# Altium PCB medusa-AI.PcbDoc
Units mm, origin at the board's own origin, x right, y up, seen from the top; angles counter-clockwise.
Board outline 184.4 x 70.23 mm, 4 copper layers (Top Layer, GND, VCC, Bottom Layer), stack 0.776 mm thick; 75 components, 66 nets, 400 pads, 80 vias.
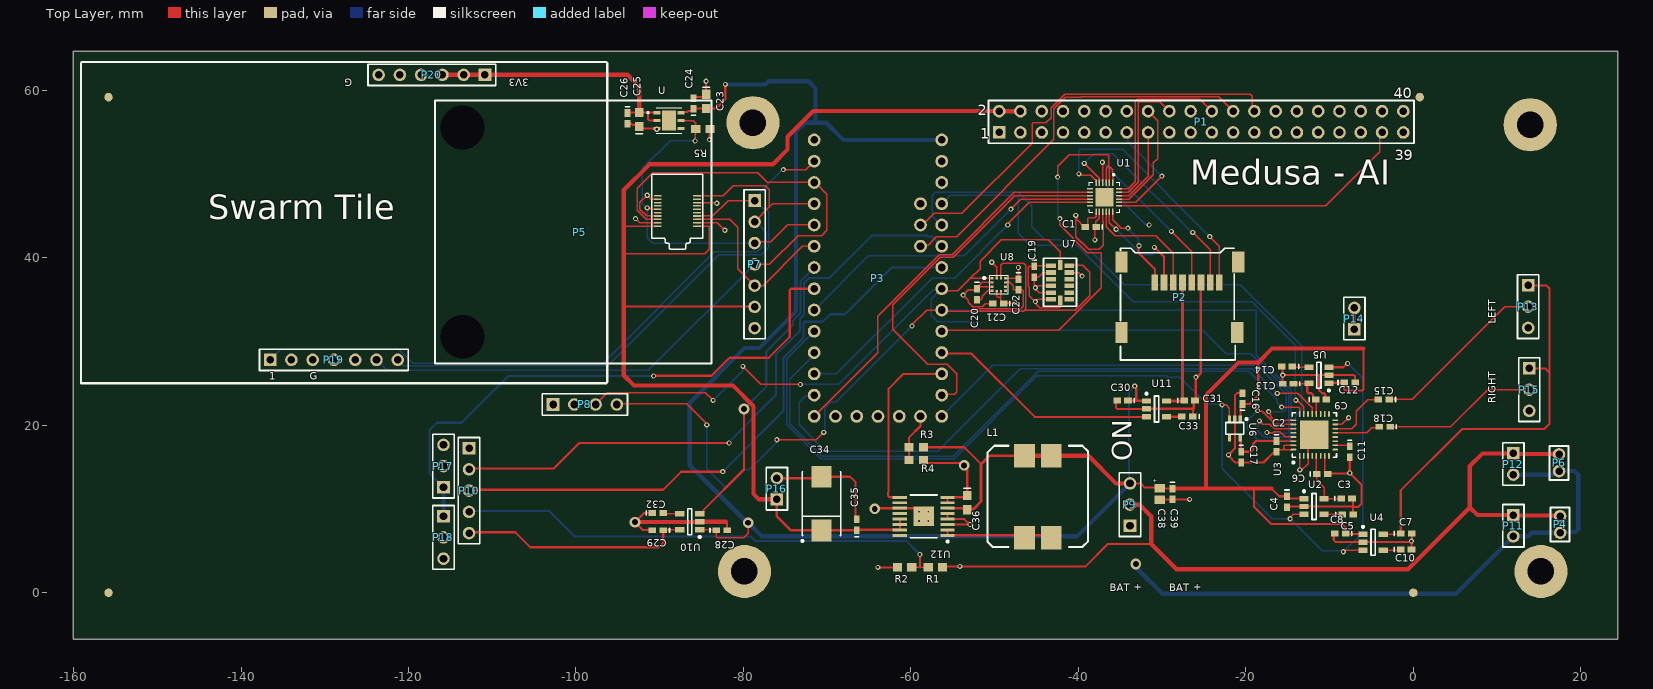
[diagram p0: Top Layer view]
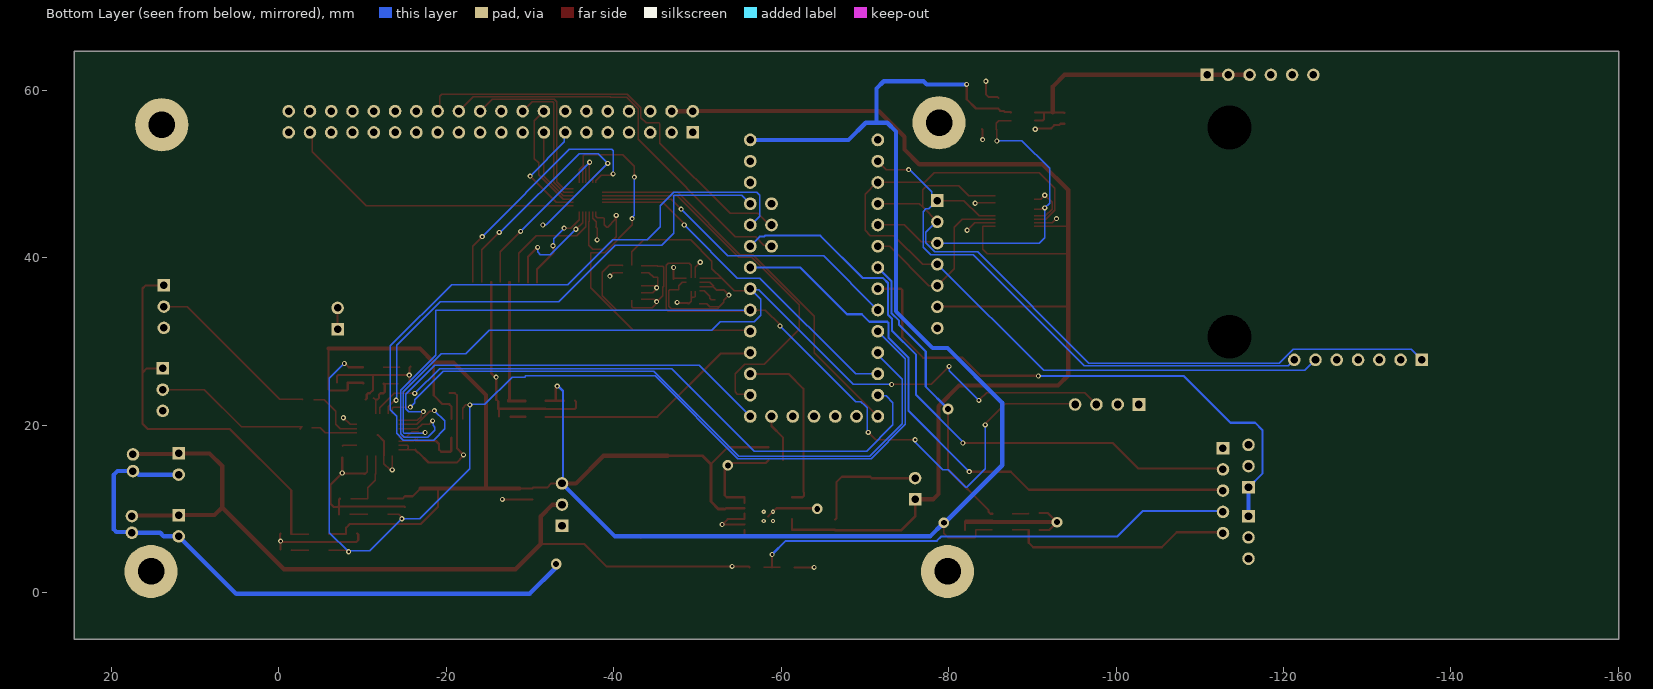
[diagram p1: Bottom Layer view, seen from below]
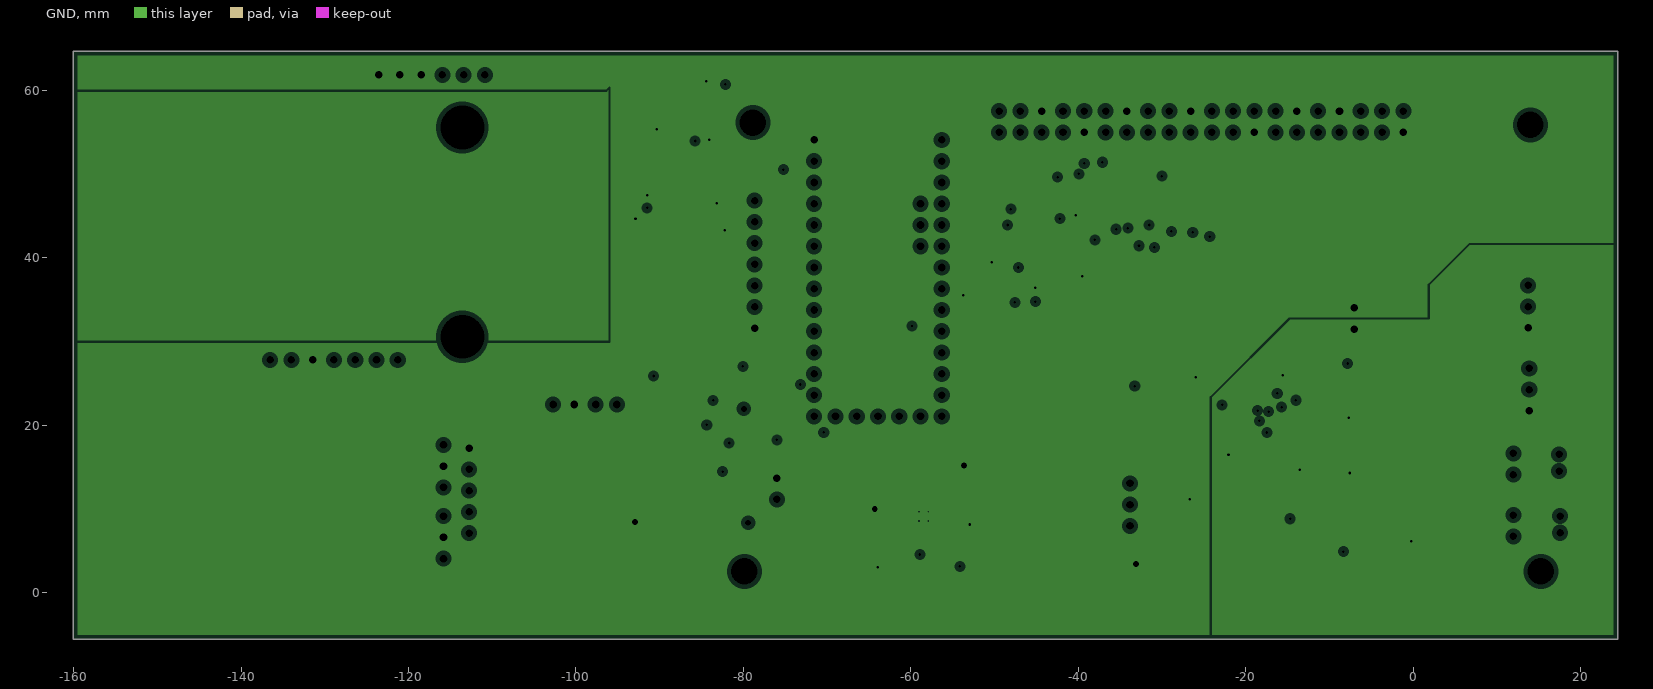
[diagram p2: GND, clearances drawn from the general rule]
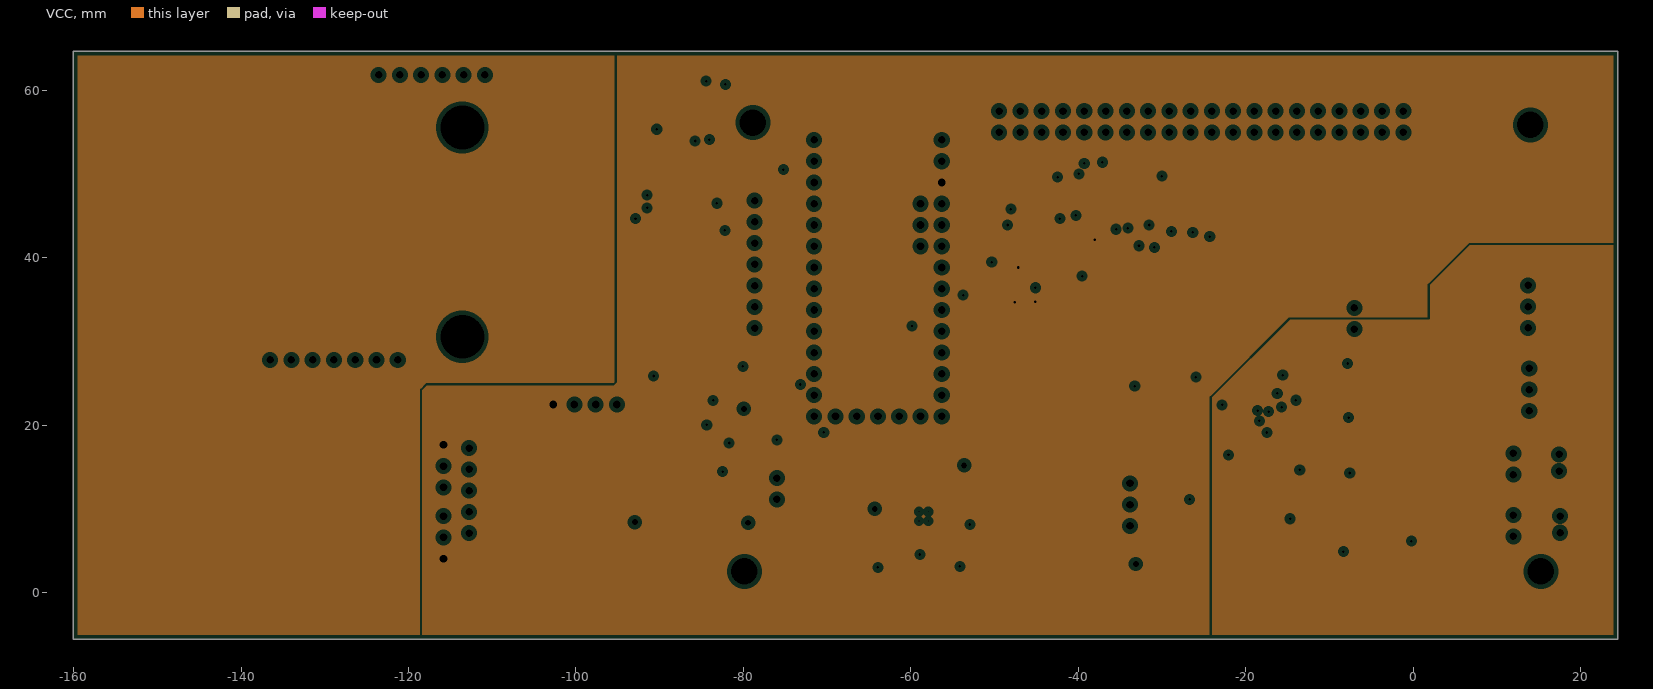
[diagram p3: VCC, clearances drawn from the general rule]

## Layer stack, top to bottom
Top Solder: solder mask 0.0102, Solder Resist, Dk 3.5
Top Layer: signal copper 0.0356
Dielectric 2: prepreg 0.254, FR-4, Dk 3.9
GND: plane copper 0.035, net DGND
Dielectric 1: dielectric 0.127, FR-4, Dk 4.8
VCC: plane copper 0.035, net 3V3
Dielectric 3: prepreg 0.254, FR-4, Dk 3.9
Bottom Layer: signal copper 0.0356
Bottom Solder: solder mask 0.0102, Solder Resist, Dk 3.5

## Board outline
-160.02,-5.588 -160.02,64.643 24.384,64.643 24.384,-5.588

## Design rules (kind name [scope] priority, off if disabled: settings)
Clearance [All] p1: gap=0.152 ignorepadtopadclearanceinfootprint=FALSE
PlaneClearance [All] p1: clearance=0.508
PlaneConnect [All] p1: planeconnectstyle=Relief reliefexpansion=0.508 reliefentries=4 reliefconductorwidth=0.254 reliefairgap=0.254
PolygonConnect [All] p1: connectstyle=Relief reliefconductorwidth=0.254 reliefentries=4 polygonreliefangle="90 Angle" airgapwidth=0.254
RoutingVias [All] p1: holewidth=0.305 width=0.61 viastyle="Through Hole" minholewidth=0.254 minwidth=0.508 maxholewidth=0.711 maxwidth=1.27
SolderMaskExpansion [All] p1: expansion=0.102 istentingtop=FALSE
Width [All] p1: maxlimit=0.508 minlimit=0.152 preferedwidth=0.254
28 further rules are at their usual default settings.

## Classes and differential pairs
component class medusa-AI: C1 C38 C39 P1 P2 P3 P4 P5 P6 P7 P8 P9 P11 P12 P17 P18 P19 P20 U1
component class medusa-AI-sensors: C19 C20 C21 C22 P10 R1 R2 U7 U8
component class medusa-AI-power: C23 C24 C25 C26 C28 C29 C30 C31 C32 C33 C34 C35 C36 L1 P16 R3 R4 R5 U U10 U11 U12
component class medusa-AI-audio: C2 C3 C4 C5 C6 C7 C8 C9 C10 C11 C12 C13 C14 C15 C16 C17 C18 P13 P14 P15 U2 U3 U4 U5 U6

## Components (designator, comment, footprint, x,y, rotation, side; value= is the part's Value field where it differs from the comment)
C1 "0.1uF" 0402 -38.537,43.662 r180 top
C2 "0.1uF" 0402 -16.357,17.47 r270 top
C3 "0.1uF" 0402 -7.975,11.247 r0 top
C4 "1uF" 0402 -15.087,10.866 r270 top value=0.1uF
C5 "0.01uF" 0402 -7.848,9.342 r0 top value=0.1uF
C6 "0.1uF" 0402 -10.896,14.168 r0 top
C7 "0.1uF" 0402 -0.863,7.056 r0 top
C8 "1uF" 0402 -8.741,7.056 r180 top value=0.1uF
C9 "0.1uF" 0402 -11.023,23.058 r0 top
C10 "0.01uF" 0402 -0.867,5.151 r0 top value=0.1uF
C11 "0.1uF" 0402 -7.594,16.82 r270 top
C12 "1uF" 0402 -7.594,25.09 r0 top value=0.1uF
C13 "0.1uF" 0402 -14.96,24.963 r180 top
C14 "0.01uF" 0402 -15.087,26.995 r180 top value=0.1uF
C15 "1.0uF" 0402 -3.53,23.058 r180 top value=0.1uF
C16 "1.0uF" 0402 -20.421,23.185 r90 top value=0.1uF
C17 "1.0uF" 0402 -20.548,16.2 r270 top value=0.1uF
C18 "1.0uF" 0402 -3.429,19.812 r180 top value=0.1uF
C19 "0.1uF" 0402 -45.268,38.328 r270 top
C20 "100nF" 0402 -52.126,35.661 r270 top value=1.0uF
C21 "1.0uF" 0402 -49.586,34.518 r180 top
C22 "100nF" 0402 -47.173,36.804 r270 top value=1.0uF
C23 "C0603" 0603 -84.455,58.674 r270 top value=10uF
C24 "1.0uF" 0402 -85.979,58.42 r90 top value=0.1uF
C25 "C0603" 0603 -92.456,56.515 r90 top value=10uF
C26 "0.1uF" 0402 -93.853,56.642 r270 top
C28 "1.0uF" 0402 -82.606,7.467 r0 top value=0.1uF
C29 "1.0uF" 0402 -90.226,7.467 r180 top value=0.1uF
C30 "1.0uF" 0402 -34.727,22.961 r180 top value=0.1uF
C31 "1.0uF" 0402 -26.726,22.961 r0 top value=0.1uF
C32 "10nF" 0402 -90.226,9.499 r0 top value=0.1uF
C33 "10nF" 0402 -26.98,21.056 r180 top value=0.1uF
C34 "T495X227K010ATE050" X -70.668,10.642 r90 top value=220uF
C35 "2.2uF" 0402 -66.477,8.102 r90 top
C36 "C0603" 0603 -53.269,10.769 r270 top value=10uF
C38 "10uF" Tant0805 -30.282,11.785 r90 top
C39 "0.1uF" 0402 -28.758,11.785 r270 top
L1 "6.8uH" "Inductor - duplicate" -46.436,6.557 r180 top
P1 "Header 20X2" HDR2X20 -49.459,54.965 r0 top
P2 "microSD-Molex" microSD_Molex_hinged -21.392,39.471 r270 top
P3 "Teensy3.x" Teensy3.x -71.557,48.996 r180 top
P4 "Battery _2mm" HDR_2x1_2mm 17.526,9.16 r180 top
P5 "Iridiuim9603" Iridium9603 -87.926,45.567 r90 top
P6 "Battery _2mm" HDR_2x1_2mm 17.399,16.526 r180 top
P7 "Iridium" HDR1X7 -78.669,46.837 r270 top
P8 "Header 4" HDR1X4 -102.743,22.479 r0 top
P9 "switch" HDR1X3 -33.838,7.975 r90 top
P10 "Header 5" HDR1X5 -112.776,17.272 r270 top
P11 "BAT" HDR1X2 11.938,9.271 r270 top
P12 "BAT" HDR1X2 11.938,16.637 r270 top
P13 "HYDROPHONE" HDR1X3 13.716,36.703 r270 top
P14 "GND Tie" HDR1X2 -7.041,31.47 r90 top
P15 "HYDROPHONE" HDR1X3 13.843,26.797 r270 top
P16 "UltraCap" HDR1X2 -76.002,11.15 r90 top
P17 "IR" HDR1X3 -115.824,12.573 r90 top
P18 "IR" HDR1X3 -115.824,9.144 r270 top
P19 "Header 7" HDR1X7 -136.525,27.813 r0 top
P20 "Header 6" HDR1X6 -110.871,61.849 r180 top
R1 "100k" 3-0603 -57.079,3.022 r0 top
R2 "100k" 3-0603 -60.762,3.022 r0 top
R3 "100k" 3-0603 -59.365,17.373 r0 top
R4 "100k" 3-0603 -59.365,15.849 r180 top
R5 "20k" 3-0603 -84.836,55.372 r0 top
U "LD39200PU33R" SON95P300X300X100-7N -88.9,56.388 r0 top
U1 "MAX4996ETG+" QFN40P350X350X80-25N -36.886,47.218 r270 top
U2 "LP3985IM5-3.3" MF05A_N -11.855,10.297 r0 top
U3 "SGTL5000" QFN32 -11.825,18.847 r90 top
U4 "LP3985IM5-3.3" MF05A_N -4.8,6.04 r0 top
U5 "LP3985IM5-3.3" MF05A_N -11.277,25.979 r180 top
U6 "TLV70018DCKR" TI-DCK5_V -21.31,19.629 r270 top
U7 "ADXL343" ADXL345 -43.272,39.039 r0 top
U8 "LIS3MDL" LGA-12 -50.297,37.55 r0 top
U10 "LP3985IM5-3.3" MF05A_N -86.416,8.483 r180 top
U11 "LP3985IM5-3.3" MF05A_N -30.663,21.945 r0 top
U12 "TPS61032" TPS6103x -58.476,9.118 r180 top

## Footprints (in the part's own frame and the unit in brackets; to place one, negate y for a bottom-side part, rotate by r counter-clockwise, add the part's x,y. Pads: shape width x height; smd on the part's side, far side on the other; paste and mask are expansions set on the pad)
3-0603 [mm] "Chip Resistor; Body 1.6 x 0.9 mm (LxW typ)"
  rect 1.1x1 smd: 1(-0.85,0) 2(0.85,0)
0402 [mm] "Chip Capacitor; Body 1.0 x 0.5 mm (LxW typ)"
  rect 0.9x0.7 smd: 1(-0.65,0) 2(0.65,0)
  silkscreen extent -1.4,-0.25 -1.4,0.25
0603 [mm] "Chip Capacitor; Body 1.6 x 0.8 mm (LxW typ)"
  rect 1.1x1 smd: 1(-0.85,0) 2(0.85,0)
  silkscreen extent -1.7,-0.4 -1.7,0.4
ADXL345 [mm] "Digital Accelerometer"
  rect 1.145x0.55 smd: 1(0,0) 2(0,-0.8) 3(0,-1.6) 4(0,-2.4) 5(0,-3.2) 6(0,-4) 8(2.195,-4) 9(2.195,-3.2) 10(2.195,-2.4) 11(2.195,-1.6) 12(2.195,-0.8) 13(2.195,0)
  rect 0.55x1.145 smd: 7(1.098,-4.098) 14(1.098,0.098)
  silkscreen extent -0.89,-4.83 3.05,0.89
HDR1X2 [mm] "Connector; Header; 2 Position"
  rect 1.5x1.5 hole 0.9: 1(0,0)
  round 1.5 hole 0.9: 2(2.54,0)
  silkscreen extent -1.27,-1.27 3.81,1.27
HDR1X3 [mm] "Connector; Header; 3 Position"
  rect 1.5x1.5 hole 0.9: 1(0,0)
  round 1.5 hole 0.9: 2(2.54,0) 3(5.08,0)
  silkscreen extent -1.27,-1.27 6.35,1.27
HDR1X4 [mm] "Connector; Header; 4 Position"
  rect 1.5x1.5 hole 0.9: 1(0,0)
  round 1.5 hole 0.9: 2(2.54,0) 3(5.08,0) 4(7.62,0)
  silkscreen extent -1.27,-1.27 8.89,1.27
HDR1X5 [mm] "Connector; Header; 5 Position"
  rect 1.5x1.5 hole 0.9: 1(0,0)
  round 1.5 hole 0.9: 2(2.54,0) 3(5.08,0) 4(7.62,0) 5(10.16,0)
  silkscreen extent -1.27,-1.27 11.43,1.27
HDR1X6 [mm] "Connector; Header; 6 Position"
  rect 1.5x1.5 hole 0.9: 1(0,0)
  round 1.5 hole 0.9: 2(2.54,0) 3(5.08,0) 4(7.62,0) 5(10.16,0) 6(12.7,0)
  silkscreen extent -1.27,-1.27 13.97,1.27
HDR1X7 [mm] "Connector; Header; 7 Position"
  rect 1.5x1.5 hole 0.9: 1(0,0)
  round 1.5 hole 0.9: 2(2.54,0) 3(5.08,0) 4(7.62,0) 5(10.16,0) 6(12.7,0) 7(15.24,0)
  silkscreen extent -1.27,-1.27 16.51,1.27
HDR2X20 [mm] "Connector; Header; 20x2 Position"
  rect 1.5x1.5 hole 0.9: 1(0,0)
  round 1.5 hole 0.9: 2(0,2.54) 3(2.54,0) 4(2.54,2.54) 5(5.08,0) 6(5.08,2.54) 7(7.62,0) 8(7.62,2.54) 9(10.16,0) 10(10.16,2.54) 11(12.7,0) 12(12.7,2.54) 13(15.24,0) 14(15.24,2.54) 15(17.78,0) 16(17.78,2.54) 17(20.32,0) 18(20.32,2.54) 19(22.86,0) 20(22.86,2.54) 21(25.4,0) 22(25.4,2.54) 23(27.94,0) 24(27.94,2.54) 25(30.48,0) 26(30.48,2.54) 27(33.02,0) 28(33.02,2.54) 29(35.56,0) 30(35.56,2.54) 31(38.1,0) 32(38.1,2.54) 33(40.64,0) 34(40.64,2.54) 35(43.18,0) 36(43.18,2.54) 37(45.72,0) 38(45.72,2.54) 39(48.26,0) 40(48.26,2.54)
  silkscreen extent -1.27,-1.27 49.53,3.81
HDR_2x1_2mm [mm]
  round 1.5 hole 0.9: 1(0,0.016) 2(0,2)
  silkscreen extent -1.14,-1.02 1.14,3.05
"Inductor - duplicate" [mm] "Sumida Inductor"
  rect 2.45x2.8 smd: 1(-3.2,0) 1(0,0) 2(-3.2,-9.8) 2(0,-9.8)
  silkscreen extent -7.6,-11 4.4,1.1
Iridium9603 [mm]
  round 1.524 hole 5.25: 0(-15,25.64) 0(9.99,25.64)
  rect 0.18x0.93 smd paste-0.02 mask+0.05: 1(-1.778,-2.37) 2(-1.778,2.3) 3(-1.378,-2.37) 4(-1.378,2.3) 5(-0.978,-2.37) 6(-0.978,2.3) 7(-0.578,-2.37) 8(-0.578,2.3) 9(-0.178,-2.37) 10(-0.178,2.3) 11(0.222,-2.37) 12(0.222,2.3) 13(0.622,-2.37) 14(0.622,2.3) 15(1.022,-2.37) 16(1.022,2.3) 17(1.422,-2.37) 18(1.422,2.3) 19(1.822,-2.37) 20(1.822,2.3)
  silkscreen extent -18.2,-4.1 13.2,28.9
LGA-12 [mm] "LIS2DS12"
  rect 0.35x0.28 smd: 1(0,0) 2(0,-0.5) 3(0,-1) 4(0,-1.5) 7(1.6,-1.5) 8(1.6,-1) 9(1.6,-0.5) 10(1.6,0)
  rect 0.28x0.35 smd: 5(0.55,-1.55) 6(1.05,-1.55) 11(1.05,0.05) 12(0.55,0.05)
  silkscreen extent -1.05,-1.85 1.9,0.35
MF05A_N [mm] "SOT23, 5-Leads, Body 2.9x1.6mm, Pitch 0.95mm, Lead Span 2.8mm, IPC Medium Density"
  rect 1.1x0.65 smd: 1(-1.2,0.95) 2(-1.2,0) 3(-1.2,-0.95) 4(1.2,-0.95) 5(1.2,0.95)
  silkscreen extent -1.32,-1.55 0.25,1.95, body extent -0.9,-1.55 0.9,1.55, height 1.19
microSD_Molex_hinged [mm]
  rect 2.5x1.5 smd: 0(0,0.508) 0(8.382,0.381)
  rect 2.5x1.45 smd: 0(0,-13.45) 0(8.382,-13.462)
  rect 1.9x0.8 smd: 1(2.4,-9.475) 2(2.4,-8.375) 3(2.4,-7.275) 4(2.4,-6.175) 5(2.4,-5.075) 6(2.4,-3.975) 7(2.4,-2.875) 8(2.4,-1.775)
  silkscreen extent -1.65,-13.59 11.68,0.13
QFN32 [mm]
  oval 0.7x0.2 smd: 1(-2.5,1.75) 2(-2.5,1.25) 3(-2.5,0.75) 4(-2.5,0.25) 5(-2.5,-0.25) 6(-2.5,-0.75) 7(-2.5,-1.25) 8(-2.5,-1.75) 17(2.5,-1.75) 18(2.5,-1.25) 19(2.5,-0.75) 20(2.5,-0.25) 21(2.5,0.25) 22(2.5,0.75) 23(2.5,1.25) 24(2.5,1.75)
  oval 0.2x0.7 smd: 9(-1.75,-2.5) 10(-1.25,-2.5) 11(-0.75,-2.5) 12(-0.25,-2.5) 13(0.25,-2.5) 14(0.75,-2.5) 15(1.25,-2.5) 16(1.75,-2.5) 25(1.75,2.5) 26(1.25,2.5) 27(0.75,2.5) 28(0.25,2.5) 29(-0.25,2.5) 30(-0.75,2.5) 31(-1.25,2.5) 32(-1.75,2.5)
  rect 3.4x3.4 smd paste-1.2: 33(0,0)
  silkscreen extent -3.42,-2.65 2.65,2.65, body extent -2.5,-2.5 2.5,2.5, height 1
QFN40P350X350X80-25N [mm]
  rrect6% 0.76x0.18 smd: 1(-1.73,1) 2(-1.73,0.6) 3(-1.73,0.2) 4(-1.73,-0.2) 5(-1.73,-0.6) 6(-1.73,-1) 13(1.73,-1) 14(1.73,-0.6) 15(1.73,-0.2) 16(1.73,0.2) 17(1.73,0.6) 18(1.73,1)
  rrect6% 0.18x0.76 smd: 7(-1,-1.73) 8(-0.6,-1.73) 9(-0.2,-1.73) 10(0.2,-1.73) 11(0.6,-1.73) 12(1,-1.73) 19(1,1.73) 20(0.6,1.73) 21(0.2,1.73) 22(-0.2,1.73) 23(-0.6,1.73) 24(-1,1.73)
  rect 2.2x2.2 smd paste-2: 25(0,0)
  silkscreen extent -2.8,-1.8 1.8,1.8
SON95P300X300X100-7N [mm]
  rrect25% 0.86x0.4 smd: 1(-1.435,0.95) 2(-1.435,0) 3(-1.435,-0.95) 4(1.435,-0.95) 5(1.435,0) 6(1.435,0.95)
  rect 1.63x2.37 smd paste-2: 7(0,0)
  silkscreen extent -2.59,-1.5 1.5,1.5
Tant0805 [mil]
  rect 40x50 smd: 1(-26.5,0) 2(26.5,0)
Teensy3.x [mil]
  round 60 hole 35: 0(0,-100) GND(0,-200)
  round 60 hole 36: 1(0,0) 2(0,100) 3(0,200) 3.3V2(-200,1100) 4(0,300) 5(0,400) 6(0,500) 7(0,600) 8(0,700) 9(0,800) 10(0,900) 11(0,1000) 12(0,1100) 13(-600,1100) 14(-600,1000) 15(-600,900) 16(-600,800) 17(-600,700) 18(-600,600) 19(-600,500) 20(-600,400) 21(-600,300) 22(-600,200) 23(-600,100) A10(-500,200) A11(-500,300) A14(-500,1100) AGND(-600,-100) AREF(-500,100) GND2(-300,1100) PGM(-400,1100) VBat(-100,1100) Vin(-600,-200)
  round 60 hole 36 paste+0: 3.3V(-600,0)
TI-DCK5_V [mm] "SOT23, 5-Leads, Body 2x1.25mm, Pitch 0.65mm"
  rect 0.9x0.4 smd: 1(-1.1,0.65) 2(-1.1,0) 3(-1.1,-0.65) 4(1.1,-0.65) 5(1.1,0.65)
  silkscreen extent -1.22,-1.07 0.7,1.53, body extent -0.63,-1 0.63,1, height 1.1
TPS6103x [mm] "TSOP, 16-Leads, Body 5.00x4.40mm, Pitch 0.65mm, Thermal Pad 2.31.2x2.46.2mm, IPC Medium Density"
  rect 1.7x0.35 smd: 1(-2.85,2.275) 2(-2.85,1.625) 3(-2.85,0.975) 4(-2.85,0.325) 5(-2.85,-0.325) 6(-2.85,-0.975) 7(-2.85,-1.625) 8(-2.85,-2.275) 9(2.85,-2.275) 10(2.85,-1.625) 11(2.85,-0.975) 12(2.85,-0.325) 13(2.85,0.325) 14(2.85,0.975) 15(2.85,1.625) 16(2.85,2.275)
  rect 2.46x2.31 smd: 17(0,0)
  silkscreen extent -2.98,-2.55 1.6,3.12, body extent -2.25,-2.55 2.25,2.55, height 1.2
X [mm] "Capacitor, SM Tantalum; Body 7.3 x 4.3 mm (LxW typ)"
  rect 2.6x2.4 smd: 1(-3.2,0) 2(3.2,0)
  silkscreen extent -4.57,-2.3 3.8,2.42

## Part data
C1 C2 C3 C4 C5 C6 C7 C8 C9 C10 C11 C12 C13 C14 C15 C16 C17 C18 C19 C20 C21 C22 C24 C26 C28 C29 C30 C31 C32 C33 C35 C39: library part C0402, "Ceramic Chip Capacitor - Standard", PackageDocument=Mar-2001, Code_IPC="1005 [0402]", Code_JEITA=0402, ComponentLink1Description="Manufacturer Link", ComponentLink1URL=http://www.kemet.com/, ComponentLink2Description=Datasheet, ComponentLink2URL=http://www.kemet.com/kemet/web/homepage/kechome.nsf/vapubfilesname/F3102TA.pdf/$file/F3102TA.pdf, DatasheetDocument=Mar-2001, LatestRevisionDate=19-Mar-2004, LatestRevisionNote="Silkscreen size reduced.", Note="Footprint corresponds to dimensions for bulk cassette packaging. This case size has tightened tolerances.", PackageReference=0402, Published=17-Jul-2002, Publisher="Altium Limited"
C23 C25 C36: "Ceramic Chip Capacitor - Standard", PackageDocument=Mar-2001, Code_IPC="1608 [0603]", Code_JEITA=0603, ComponentLink1Description="Manufacturer Link", ComponentLink1URL=http://www.kemet.com/, ComponentLink2Description=Datasheet, ComponentLink2URL=http://www.kemet.com/kemet/web/homepage/kechome.nsf/vapubfilesname/F3102TA.pdf/$file/F3102TA.pdf, DatasheetDocument=Mar-2001, LatestRevisionDate=19-Mar-2004, LatestRevisionNote="Silkscreen size reduced.", Note="Footprint corresponds to dimensions for bulk cassette packaging. This case size has tightened tolerances.", PackageReference=0603, Published=17-Jul-2002, Publisher="Altium Limited"
C34: library part T495X, "Solid Tantalum Chip Capacitor, Standard T495 Series - Low ESR, Surge Robust", PackageDocument=Mar-2001, Code_JEITA=7343-43, ComponentLink1Description="Manufacturer Link", ComponentLink1URL=http://www.kemet.com/, ComponentLink2Description=Datasheet, ComponentLink2URL=http://www.kemet.com/kemet/web/homepage/kechome.nsf/vapubfilesname/F3102TA.pdf/$file/F3102TA.pdf, DatasheetDocument=Mar-2001, LatestRevisionDate=19-Mar-2004, LatestRevisionNote="Silkscreen dimensions re-sized.", PackageReference=X, PCB_Layout="Round Glue Pad at 2.9 ±0.1mm in diameter at KEMET's option", Published=17-Jul-2002, Publisher="Altium Limited"
C38: library part Tant0805
L1: library part "Inductor 6.8uH", "Sumida Inductor", Supplier Part Number 1=308-1937-2-ND, Supplier 1=Digi-Key
P1: "Header, 20-Pin, Dual row", LatestRevisionDate=17-Jul-2002, LatestRevisionNote="Re-released for DXP Platform.", Publisher="Altium Limited"
P2: library part microSD_Molex_hinged, Supplier Part Number 1=WM19081DKR-ND, Supplier 1=Digi-Key
P4 P6: library part HDR_2x1_2mm, "Charging Connector"
P5: library part IRIDIUM9603
P7: library part "Header 7", "Header, 7-Pin", LatestRevisionDate=17-Jul-2002, LatestRevisionNote="Re-released for DXP Platform.", Publisher="Altium Limited"
P8: "Header, 4-Pin", LatestRevisionDate=17-Jul-2002, LatestRevisionNote="Re-released for DXP Platform.", Publisher="Altium Limited"
P9 P13 P15 P17 P18: library part "Header 3", "Header, 3-Pin", LatestRevisionDate=17-Jul-2002, LatestRevisionNote="Re-released for DXP Platform.", Publisher="Altium Limited"
P10: "Header, 5-Pin", LatestRevisionDate=17-Jul-2002, LatestRevisionNote="Re-released for DXP Platform.", Publisher="Altium Limited"
P11 P12 P14 P16: library part "Header 2", "Header, 2-Pin", LatestRevisionDate=17-Jul-2002, LatestRevisionNote="Re-released for DXP Platform.", Publisher="Altium Limited"
P19: "Header, 7-Pin", LatestRevisionDate=17-Jul-2002, LatestRevisionNote="Re-released for DXP Platform.", Publisher="Altium Limited"
P20: "Header, 6-Pin", LatestRevisionDate=17-Jul-2002, LatestRevisionNote="Re-released for DXP Platform.", Publisher="Altium Limited"
R1 R2 R3 R4 R5: library part ERJ3RK, "Precision Thick Film Chip Resistor, 10 Ohm to 1M Ohm Range, 1% and 0.5% Tolerance, 0603 Size, 0.063 W", PackageDocument=Mar-2003, Code_IPC="1608 [0603]", ComponentLink1Description="Manufacturer Link", ComponentLink1URL=http://www.panasonic.com/industrial/components/resistive_products.htm, ComponentLink2Description=Datasheet, ComponentLink2URL=http://www.panasonic.com/industrial/components/pdf/AOA0000CE2.pdf, LatestRevisionDate=19-Mar-2004, LatestRevisionNote="Silkscreen size reduced.", PackageReference=3-0603, Published=17-Dec-2003, Publisher="Altium Limited"
U: "Linear Voltage Regulator IC 1 Output 2A 6-DFN _3x3_", Package="DFN-6 STMicroelectronics", Availability=Unavailable, MF=STMicroelectronics, MP=LD39200PU33R, Price=None, SnapEDA_Link=https://www.snapeda.com/parts/LD39200PU33R/STMicroelectronics/view-part/482679/?ref=snap
U1: "3 Circuit IC Switch 2:2 4Ohm 24-TQFN (4x4)", Package="TQFN-24 Maxim", Availability=Warning, Check_prices=https://www.snapeda.com/parts/MAX4996ETG+/Maxim%20Integrated/view-part/1193961/?ref=eda, MF="Maxim Integrated", MP=MAX4996ETG+, Price=None, Purchase-URL=https://pricing.snapeda.com/search/part/MAX4996ETG+/?ref=eda, SnapEDA_Link=https://www.snapeda.com/parts/MAX4996ETG+/Maxim%20Integrated/view-part/1193961/?ref=snap
U2 U4 U5 U10 U11: "Micropower, 150mA Low-Noise Ultra Low-Dropout CMOS Voltage Regulator", DigiKeyPartNumber=LP3985IM5-3.3CT-ND, Manufacturer="National Semiconductor", PackageTopMarking=LDQB*XTT, PowerWise=N, ComponentLink1Description="LP3985 Datasheet", ComponentLink1URL=http://www.national.com/ds/LP/LP3985.pdf, ComponentLink2Description="LP3985 Web Page", ComponentLink2URL=http://www.national.com/pf/LP/LP3985.html, ComponentLink3Description="MF05A Package Page", ComponentLink3URL=http://www.national.com/packaging/folders/mf05a.html, CompType="LDO IC", DatasheetVersion=Aug-2005, PackageDescription="Molded SOT-23, .115 x .063 x .040 in Body, 5 Lead, .0375 in Pitch", PackageReference=MF05A, PackageVersion="revD, Aug-2008", PartNumber=LP3985IM5-3.3, PinCount=5, Published=4-Dec-2008, Publisher="Altium Limited", RoHS=O
U6: "Single Output LDO, 200 mA, Fixed 1.8 V Output, 2 to 5.5 V Input, with Low IQ, 5-pin SC70 (DCK), -40 to 125 degC, Green (RoHS & no Sb/Br)", Manufacturer="Texas Instruments", Supplier Part Number 1=296-32409-2-ND, Accuracy(%)=2, Code_JEDEC=MO-203, ComponentLink1Description="Manufacturer URL", ComponentLink1URL=http://www.ti.com/, ComponentLink2Description=Datasheet, ComponentLink2URL=http://www.ti.com/general/docs/lit/getliterature.tsp?genericPartNumber=TLV70018&fileType=pdf, ComponentLink3Description="Package Specification", ComponentLink3URL=http://www.ti.com/litv/pdf/mpds025f, DatasheetVersion=SLVSA00D, Eco-Plan="Green (RoHS & no Sb/Br)", Fixed Output Options(V)=1.8, Iout(Max)(A)=0.2, Iq(Typ)(mA)=0.03, Mounting Technology="Surface Mount", PackageDescription="5-Pin Plastic Small-Outline, Body 2 x 1.25 mm, Pitch 0.65 mm", PackageReference=DCK5, PackageVersion=4093553-3/G, PartNumber=TLV70018DCKR, SubFamily="Single Channel LDO", Supplier 1=Digi-Key, Supplier 2=Digi-Key, Supplier 3=Digi-Key, Supplier 4=Newark, Supplier 5=Mouser, Supplier Part Number 2=296-32409-1-ND, Supplier Part Number 3=296-32409-6-ND, Supplier Part Number 4=55R7461, Supplier Part Number 5=595-TLV70018DCKR, Vdo(Typ)(mV)=175, Vin(Max)(V)=5.5, Vin(Min)(V)=2, Vout Adj(Max)(V)=1.8, Vout Adj(Min)(V)=1.8
U7: library part ADXL345
U8: "magnetometer"
U12: library part TPS6103x, "Boost converter", Supplier 1=Newark, Supplier 2=Digi-Key, Supplier Part Number 2=296-14418-1-ND

## Free pads (board coordinates)
  round 1.016 smd paste-0.508 mask+0.127: 0(-155.829,0) 0(-155.829,59.182) 0(0,0) 0(0.762,59.182)
  round 6.35 hole 3.175: 0(-79.883,2.54) 0(-78.867,56.134) 0(13.97,55.88) 0(15.24,2.54)

## Via types
v1: diameter 0.61, hole 0.305, Top Layer to Bottom Layer, 70 vias
v2: diameter 1.27, hole 0.711, Top Layer to Bottom Layer, 6 vias
v3: diameter 0.5, hole 0.2, Top Layer to Bottom Layer, 4 vias

## Nets (pads, with @x,y where several pads share a name; then routed paths per layer and width w, separated by ;. In a path a pad name is that pad's centre, name@x,y a point inside that pad or via, vN(x,y) a via of type N, cw(c..) or ccw(c..) an arc to the next point about the centre after c; other vN are vias at no path point)
3V3: C1.1 C19.1 C21.1 C22.1 P3.3.3V P8.1 P17.3 P18.3 U1.14 U7.1 U7.6 U7.7 U8.5 U8.6 U8.10 | length 24.2
  Top Layer w0.152: U8.5 -49.747,35.369 -49.658,35.28 -49.374,35.28 -49.247,35.153 ; U8.6 -49.247,35.153 ; C21.1 -48.974,34.518 -49.247,34.792 -49.247,35.153 ; U8.10 -47.269,37.55 C22.1 ; U7.6 -44.874,35.039 v1(-45.141,34.772) ; U7.1 -45.207,39.039 C19.1 -45.888,38.978 -45.98,38.887 -45.98,36.626 -45.845,36.492 -45.845,35.476 v1(-45.141,34.772) ; U7.7 -42.175,34.15 -42.264,34.061 -44.633,34.061 -45.141,34.569 v1(-45.141,34.772) ; v1(-38.029,42.138) -38.029,43.52 C1.1 -37.902,43.677 -37.902,44.297 -37.486,44.713 U1.14
  Top Layer w0.254: C21.1 -48.852,34.602 -47.654,34.602 v1(-47.586,34.67) ; C22.1 v1(-47.173,38.836)
5V_ENABLE: P3.15 U12.9 | length 21.4
  Top Layer w0.254: U12.9 -62.571,11.393 -62.72,11.542 -62.72,11.986 -62.667,12.039 -62.667,24.358 -60.889,26.136 P3.15
AGND: C2.2 C3.2 C4.2 C5.2 C6.2 C7.2 C8.2 C9.2 C10.2 C11.2 C12.2 C13.2 C14.2 C16.2 C17.2 P13.3 P14.1 P15.3 U2.2 U3.1 U3.3 U3.7 U3.15 U3.31 U3.32 U3.33 U4.2 U5.2 U6.2 | length 76.9
  Top Layer w0.152: C2.2@-16.357,17.089 -16.349,17.097 -15.337,17.097 ; U3.32 -15.337,17.097 ; U3.31 -15.341,17.597 -15.468,17.47 -15.468,17.228 -15.337,17.097 ; U3.1 -13.575,14.815 -13.436,14.675 -13.309,14.675 -12.575,15.41 U3.3 ; U3.7 -10.575,14.441 -10.301,14.168 C6.2 ; U3.15 -8.523,20.097 v1(-7.721,20.899)
  Top Layer w0.203: U3.3 U3.33@-12.575,18.097
  Top Layer w0.254: C16.2 -21.041,23.835 -21.31,23.566 -21.31,17.216 v1(-22.072,16.454) -22.072,16.357 -21.645,15.93 -21.645,15.899 -21.31,15.565 -20.563,15.565 C17.2 -17.896,15.55 -16.68,16.766 -16.58,16.766 -16.357,16.989 C2.2@-16.357,17.089 ; C14.2 -15.61,26.868 v1@-15.61,25.979 ; C13.2 v1@-15.61,25.979 ; C4.2 -15.006,10.297 U2.2 -7.198,10.297 ; U3.33@-12.575,18.097 U3.33 ; C9.2 -10.515,23.2 -10.515,23.671 -10.664,23.82 -10.896,23.82 -11.277,24.201 -11.277,25.979 ; C6.2 -10.183,14.231 -7.658,14.231 v1(-7.594,14.295) ; C8.2 -9.499,6.948 -9.499,6.294 -9.245,6.04 v1@-0.25,6.04 ; C11.2 v1(-7.594,14.295) ; C3.2 -7.198,11.12 -7.198,10.297 ; C5.2 -7.198,10.297 ; C12.2 -6.944,25.83 -7.093,25.979 U5.2 -11.277,25.979 ; C10.2 -0.217,6.007 v1@-0.25,6.04 ; C7.2 -0.173,7.015 -0.173,6.117 v1@-0.25,6.04 ; v1@-15.61,25.979 v1(-15.595,25.979) -11.277,25.979 ; v1(-7.594,14.295) -6.197,12.898 -6.197,10.612 -6.578,10.231 -7.086,10.231 -7.152,10.297 -7.198,10.297
  other v1: -0.228,6.167 -13.563,14.676
BCLK: P3.9 U3.24 | length 79.2
  Top Layer w0.152: v1(-15.722,22.169) -13.69,22.169 -13.575,22.054 U3.24
  Bottom Layer w0.152: P3.9 -71.557,28.422 -74.478,25.501 -74.478,20.167 -70.618,16.306 -54.971,16.306 -44.811,26.466 -19.672,26.466 -16.239,23.034 -16.239,22.686 v1(-15.722,22.169)
CS: P3.10 U1.11 | length 41.6
  Top Layer w0.152: v1@-48.57,43.916 -45.868,46.618 U1.11
  Bottom Layer w0.152: P3.10 -68.89,26.136 -57.46,37.566 -54.793,37.566 v1(-48.443,43.916)
DGND: C1.2 C19.2 C20.1 C21.2 C22.2 C23.1 C24.2 C25.1 C26.2 C28.2 C29.2 C30.2 C31.2 C32.1 C33.1 C34.2 C35.2 C36.1 C38.1 C39.2 P1.6 P1.9 P1.14 P1.20 P1.25 P1.30 P1.34 P1.39 P2.6 P3.GND P4.2 P5.3 P5.4 P5.8 P5.15 P5.18 P6.2 P7.7 P8.2 P10.1 P11.2 P12.2 P14.2 P16.2 P17.2 P18.2 P19.3 P20.4 P20.5 P20.6 R2.1 R4.1 R5.2 U1.13 U1.15 U7.2 U7.4 U7.5 U7.12 U8.2 U8.3 U8.9 U8.12 U10.2 U11.2 U12.3 U12.4 U12.5 U12.7 U12.8 U12.11 U12.17 U.3 | length 232.5
  Top Layer w0.152: v1(-92.893,44.678) -92.404,44.189 P5.4 ; P5.8 -91.553,44.989 -92.366,45.801 -92.366,46.603 v1(-91.496,47.472) -91.013,46.989 P5.18 ; P5.3 -83.133,44.189 v1(-82.225,43.281) ; P5.15 -83.247,46.589 -83.114,46.456 v1@-83.114,46.329 ; v1(-53.777,35.534) -53.162,34.919 -53.162,34.665 -52.634,34.137 ; C20.1 -51.887,36.55 U8.3 ; C20.1@-51.937,36.6 -51.487,37.05 U8.2 ; v1(-50.348,39.471) -49.747,38.87 U8.12 ; C21.2 -51.11,34.518 -51.491,34.137 -52.634,34.137 ; U8.9 -48.181,37.05 -47.808,36.677 -47.808,36.258 -47.719,36.169 -47.188,36.169 C22.2 -46.678,36.154 -46.589,36.065 -46.589,34.226 -46.876,33.939 -52.437,33.939 -52.634,34.137 ; U7.5 -44.684,35.839 -45.268,36.423 -45.268,36.728 ; U7.4 -45.179,36.639 -45.268,36.728 ; U7.2 -44.214,38.239 -44.775,37.678 C19.2 -45.268,36.728 ; U7.12 -39.972,38.239 v1(-39.553,37.82) ; U1.13 -37.886,44.948 -38.029,44.805 -38.791,44.805 -38.881,44.716 -38.881,43.936 -39.154,43.662 C1.2 -39.287,43.662 -40.224,44.598 -40.224,44.967 v1(-40.311,45.055) -40.311,42.515 -38.791,40.995 -37.521,40.995 -37.013,41.503 -37.013,44.297 -37.086,44.37 U1.15 ; -26.33,21.833 -26.218,21.945 ; C31.2@-26.218,22.819 C31.2 C31.2@-25.964,23.073 ; v1@-25.964,25.628 v1(-25.964,25.755)
  Top Layer w0.254: C26.2 -93.838,56.007 -93.367,56.007 -93.218,55.858 -92.649,55.858 C25.1 -92.229,55.438 U.3 -90.408,55.365 U.3@-90.638,55.365 ; v2(-92.957,8.42) -92.004,7.467 C29.2 ; v2@-92.893,8.483 -91.877,9.499 C32.1 ; C24.2 -85.867,59.182 -84.797,59.182 C23.1 v1(-84.455,61.087) ; v1(-84.074,54.102) -84.074,55.284 R5.2 ; -82.098,8.483 -81.956,8.341 C28.2 ; C34.2@-70.82,13.69 C34.2 -67.264,13.842 -66.604,13.182 -66.604,8.879 C35.2 ; v2(-64.318,10.007) -64.232,10.093 U12.11 -59.451,10.093 v3(-59.026,9.668) U12.17 ; v1(-63.937,3.022) R2.1 ; R4.1 -58.142,15.476 -54.039,15.476 -53.269,14.706 C36.1 C36.1@-53.495,11.393 ; U12.3 -55.624,8.146 -52.972,8.146 v1(-52.969,8.148) -53.614,8.793 U12.4 U12.5 ; U12.7 U12.8 ; v1(-53.777,35.534) -53.142,36.169 -52.268,36.169 C20.1 ; C30.2 -35.489,22.849 -35.489,22.094 -35.341,21.945 U11.2 ; C38.1 -28.781,11.112 C39.2 -28.743,11.15 v1(-26.726,11.15) ; C33.1 -26.33,21.833 ; -26.218,21.945 C31.2@-26.218,22.819
  Top Layer w0.305: P16.2 C34.2@-70.82,13.69 ; U12.8 C36.1@-53.495,11.393 ; U11.2 -26.218,21.945 ; C31.2@-25.964,23.073 -25.964,25.628 -25.367,26.225 P2.6
  Top Layer w0.508: v2(-92.957,8.42) -92.893,8.483 -92.862,8.451 -85.248,8.451 U10.2 -82.098,8.483
  Bottom Layer w0.508: v2(-33.147,3.429) -33.147,3.048 -29.972,-0.127 5.08,-0.127 P11.2 13.716,6.731 14.145,7.16 P4.2 17.605,7.239 19.387,7.239 19.685,7.537 19.685,14.097 19.256,14.526 P6.2 17.131,14.526 16.702,14.097 P12.2
  other v1: -45.141,36.423 -83.168,46.511 -90.353,55.346
  other v2: -53.65,15.214
  other v3: -59.026,8.568 -57.926,8.568 -57.926,9.668
GPIO22: P1.15 U1.22 | length 9.7
  Top Layer w0.152: U1.22 -33.996,47.418 -31.679,49.735 P1.15
GPIO23: P1.16 U1.21 | length 13.6
  Top Layer w0.152: U1.21 -33.965,47.018 -31.044,49.939 -31.044,51.346 -30.536,51.854 -30.536,56.362 P1.16
GPIO24: P1.18 U1.23 | length 16.5
  Top Layer w0.152: U1.23 -34.027,47.818 -32.822,49.023 -32.822,58.533 -32.733,58.623 -30.257,58.623 P1.18
GPIO25: P1.22 U1.24 | length 21.7
  Top Layer w0.152: U1.24 -34.058,48.218 -33.203,49.073 -33.203,58.621 -32.897,58.927 -25.482,58.927 P1.22
GPIO26: P1.37 U1.19 | length 36.2
  Top Layer w0.152: U1.19 -10.454,46.218 -3.993,52.679 -3.993,54.711 P1.37
GPIO27: P1.13 U1.20 | length 13.4
  Top Layer w0.152: U1.20 -33.168,46.618 v1(-30.028,49.758)
  Bottom Layer w0.152: P1.13 -34.133,54.879 -34.133,53.863 v1(-30.028,49.758)
GPS_EN: P3.5 U10.3 | length 35.2
  Top Layer w0.254: U10.3 -84.991,9.433 -84.793,9.631 -84.793,9.856 -79.939,14.71 v2(-79.939,21.945)
  Bottom Layer w0.254: v2(-79.939,21.945) -77.272,24.612 -77.272,28.803 -74.097,31.978 -74.097,32.463 -73.183,33.378 -73.183,37.21 P3.5
HYDRO_EN: P3.8 U2.3 U4.3 U5.3 U6.3 | length 131
  Top Layer w0.152: v1(-22.834,22.423) -22.356,22.423 -21.96,22.027 U6.3 ; v1@-14.833,8.834 -14.32,9.347 U2.3 ; v1(-8.356,4.897) -8.163,5.09 U4.3@-6.004,5.09
  Top Layer w0.254: U5.3 -8.371,26.929 -7.924,27.376 v1(-7.848,27.376)
  Bottom Layer w0.152: P3.8 -74.859,27.914 -74.859,20.117 -70.744,16.001 -54.845,16.001 -44.964,25.882 -29.52,25.882 -29.393,25.755 -27.869,25.755 -24.593,22.479 v1@-22.987,22.479 ; v1(-22.834,22.423) -22.834,14.833 -16.827,8.826 -15.876,8.826 -15.868,8.834 v1(-14.706,8.834) -10.896,5.024 v1@-8.356,5.024 ; v1(-8.356,4.897) -6.07,7.183 -6.07,25.598 v1(-7.848,27.376)
I2SDIN: P3.22 U3.26 | length 82.5
  Top Layer w0.152: v1(-18.605,21.75) -18.53,21.674 -18.072,21.674 -16.494,20.097 U3.26
  Bottom Layer w0.152: P3.22 -56.444,43.916 -57.46,44.932 -57.46,47.472 -57.079,47.853 -47.213,47.853 -45.567,46.208 -45.567,43.707 -43.998,42.138 -39.871,42.138 -34.537,36.804 -20.675,36.804 -13.335,29.464 -13.335,21.844 -14.079,21.1 -14.079,19.058 -14.899,18.237 -18.491,18.237 -19.812,19.558 -19.812,20.543 v1(-18.605,21.75)
I2SDOUT: P3.13 U3.25 | length 52.7
  Top Layer w0.152: v1(-17.275,21.632) -17.275,21.508 -17.005,21.239 -17.005,21.039 -16.563,20.597 U3.25
  Bottom Layer w0.152: P3.13 -50.221,27.152 -18.643,27.152 -15.189,23.698 -15.189,21.948 -15.546,21.59 -17.233,21.59 v1(-17.275,21.632)
IN_L: C15.2 U3.14 | length 7.5
  Top Layer w0.152: U3.14 -7.372,19.597 -6.832,20.137 -6.832,21.661 -5.435,23.058 C15.2
IN_R: C18.2 U3.13 | length 5.6
  Top Layer w0.152: U3.13 -5.541,19.097 -4.953,19.685 C18.2@-3.937,19.685
IR: P3.6 P17.1 P18.1 | length 67.2
  Top Layer w0.254: v1@-90.805,25.908 -83.82,25.908 -81.661,28.067 -77.216,28.067 -77.194,28.045 -76.984,28.045 -74.478,30.551 -74.478,36.157 -74.339,36.296 P3.6
  Bottom Layer w0.254: P17.1 -117.475,14.224 -117.475,19.431 -116.614,20.292 -113.665,20.292 -108.075,25.882 v1(-90.734,25.882)
  Bottom Layer w0.508: P18.1 P17.1
IR_SLEEP: P3.4 P5.5 P7.5 | length 22.1
  Top Layer w0.152: P5.5 -81.628,44.589 -80.701,43.662 -80.701,38.709 P7.5 -77.653,36.677 -72.954,41.376 P3.4
LRCLK: P3.23 U3.23 | length 61.2
  Top Layer w0.152: v1@-13.817,22.931 -13.075,22.189 U3.23
  Bottom Layer w0.152: P3.23 -55.301,47.472 -47.263,47.472 -47.173,47.383 -47.173,42.9 -45.776,41.503 -40.188,41.503 -33.457,34.772 -19.318,34.772 -14.097,29.551 -14.097,23.063 v1(-14.021,22.987)
MCLK: P3.11 U3.21 | length 74.1
  Top Layer w0.152: v1(-16.25,23.799) -13.797,23.799 -12.075,22.078 U3.21
  Bottom Layer w0.152: P3.11 -71.659,23.494 -72.548,23.494 -73.335,22.707 -73.335,20.04 -70.211,16.916 -56.775,16.916 -46.919,26.771 -19.222,26.771 v1(-16.25,23.799)
MISO: P3.12 U1.8 | length 46.6
  Top Layer w0.152: P3.12 -63.947,28.666 -63.947,33.038 -56.6,40.385 -55.072,40.385 -47.639,47.818 U1.8
MOSI: P3.7 U1.10 | length 38.4
  Top Layer w0.152: v1(-48.062,45.821) -46.865,47.018 U1.10
  Bottom Layer w0.152: P3.7 -65.08,40.233 -53.65,40.233 v1(-48.062,45.821)
NetAv: P3.2 P5.19 P7.2 P19.1 | length 89
  Top Layer w0.152: P5.19 -82.435,47.389 -81.209,48.615 -77.399,48.615 -76.891,48.107 -76.891,46.075 ; P7.2 -76.891,46.075 ; P3.2 -76.51,46.456 -76.891,46.075
  Bottom Layer w0.152: P19.1 -135.255,29.083 -121.171,29.083 -119.52,27.432 -96.774,27.432 -83.515,40.691 -78.352,40.691 -77.267,41.776 -77.267,43.053 -78.511,44.297 P7.2
NetC5_1: C5.1 U2.4 | length 2.2
  Top Layer w0.152: U2.4 -8.503,9.347 C5.1
NetC10_1: C10.1 U4.4 | length 2.1
  Top Layer w0.152: U4.4@-3.604,5.09 -1.578,5.09 C10.1
NetC11_1: C11.1 U3.10 | length 1.8
  Top Layer w0.152: U3.10 -7.721,17.597 C11.1
NetC14_1: C14.1 U5.4 | length 2
  Top Layer w0.152: C14.1 -14.371,26.929 U5.4
NetC15_1: C15.1 P13.2 | length 21.2
  Top Layer w0.152: C15.1 C15.1@-2.824,23.114
  Top Layer w0.2: C15.1@-2.824,23.114 -0.127,23.114 10.922,34.163 P13.2
NetC18_1: C18.1 P15.2 | length 19
  Top Layer w0.152: C18.1 C18.1@-2.505,19.538 ; P15.2@13.736,24.364 P15.2
  Top Layer w0.2: C18.1 4.445,19.812 8.89,24.257 P15.2
NetC20_2: C20.2 U8.4 | length 2.4
  Top Layer w0.152: C20.2 -51.633,35.011 -51.491,35.153 -51.491,35.407 -50.848,36.05 U8.4
NetC32_2: C32.2 U10.4 | length 2
  Top Layer w0.152: C32.2 -89.51,9.433 U10.4
NetC33_2: C33.2 U11.4 | length 1.9
  Top Layer w0.152: C33.2@-27.691,20.995 C33.2
  Top Layer w0.305: U11.4 C33.2@-27.691,20.995
NetL1_1: L1.1 U12.1 U12.2 | length 13.2
  Top Layer w0.254: U12.1 U12.2 ; L1.1@-43.522,6.843 L1.1@-43.236,6.557
  Top Layer w0.305: U12.1 L1.1@-43.522,6.843
PGM: P3.PGM
PI_STATUS: P1.26 P3.A10 | length 50.1
  Top Layer w0.152: P3.A10 -58.603,43.916 -57.206,45.313 -53.904,45.313 -45.522,53.695 -45.522,56.019 -45.433,56.108 -43.871,56.108 -43.236,56.743 -43.236,57.923 -41.622,59.537 -19.487,59.537 -19.233,59.283 -19.233,57.759 P1.26
PI_STATUS2: P1.24 P3.A11 | length 47.6
  Top Layer w0.152: P3.A11 -58.718,41.515 -57.956,41.515 -56.952,42.519 -54.539,42.519 -42.932,54.127 -42.932,57.797 -41.572,59.156 -39.68,59.156 -39.604,59.232 -23.247,59.232 P1.24
RI: P3.3 P5.12 P7.3 R5.1 U.5 | length 42.6
  Top Layer w0.152: v1(-91.496,45.948) -91.242,45.948 -91.083,45.789 P5.12 ; U.5 -85.979,56.388 -85.686,56.095 R5.1 -85.781,55.277 v1(-85.781,53.949) ; P7.3 -78.542,41.884 -76.764,41.884 -74.732,43.916 P3.3
  Bottom Layer w0.152: v1@-85.852,53.975 -88.773,53.975 -92.075,50.673 -92.075,46.527 v1(-91.496,45.948) -91.496,42.392 -90.861,41.757 P7.3
RX: P3.0 P5.7 P7.1 P19.7 | length 74.1
  Top Layer w0.152: P5.7 -83.692,44.989 -81.844,46.837 P7.1 ; v1(-75.24,50.52) -72.573,50.52 P3.0
  Bottom Layer w0.152: P19.7 -121.273,27.813 -120.587,27.127 -96.19,27.127 -82.931,40.386 -77.851,40.386 -76.962,41.275 -76.962,45.504 -77.292,45.833 -77.666,45.833 P7.1 -77.996,47.511 -77.996,47.861 v1@-75.311,50.546 ; P3.0@-71.786,51.307 P3.0
RXD2: P3.20 P10.3 | length 72
  Top Layer w0.254: P10.3@-112.578,12.293 -89.591,12.293 -87.432,14.452 v1(-82.479,14.452)
  Bottom Layer w0.254: v1(-82.479,14.452) -75.215,21.716 -75.215,28.061 -72.827,30.449 -72.827,32.21 -72.679,32.359 -70.541,32.359 -69.652,33.248 -67.874,33.248 -62.286,38.836 P3.20
SCK: P3.14 U1.9 | length 45.8
  Top Layer w0.152: P3.14 -56.19,23.723 -54.793,23.723 -54.539,23.977 -54.539,26.136 -55.682,27.279 -57.968,27.279 -62.159,31.47 -62.159,34.395 -56.474,40.081 -54.946,40.081 -47.608,47.418 U1.9
SCL: P3.19 P8.3 U3.29 U7.14 U8.1 | length 133
  Top Layer w0.152: P8.3 -96.266,23.876 -84.537,23.876 -83.749,23.088 v1@-83.749,22.961 ; v1(-80.066,27.025) -77.907,24.866 v1(-73.208,24.866) ; P3.19 -56.063,36.042 -54.412,36.042 -52.888,37.566 ; U8.1 -52.872,37.55 -52.888,37.566 ; U7.14 -42.175,40.696 -43.617,42.138 -49.205,42.138 -51.745,39.598 -51.745,38.709 -52.888,37.566 ; v1(-17.489,19.132) -17.477,19.121 -16.74,19.121 -16.613,19.248 -15.976,19.248 -15.325,18.597 U3.29
  Bottom Layer w0.152: v1(-83.622,22.961) -80.066,26.517 v1(-80.066,27.025) v1@-80.066,27.152 ; v1@-73.081,24.866 -68.636,24.866 -57.308,36.194 P3.19@-56.419,36.194 ; P3.19 P3.19@-56.419,36.194 ; v1(-17.489,19.132) -17.407,19.05 -14.948,19.05 -14.859,19.139 -14.859,24.003 -19.418,28.562 -22.371,28.562 -25.152,31.343 -51.745,31.343 -52.747,32.344 -56.811,32.344 -57.587,33.121 -57.587,35.026 P3.19@-56.419,36.194
SD1: P2.1 U1.18 | length 11.1
  Top Layer w0.152: U1.18 -35.886,44.567 -34.854,43.535 v1(-34.092,43.535) v1@-33.965,43.535
  Top Layer w0.254: v1(-32.763,41.436) -32.822,41.376 -32.822,40.614 -30.867,38.659 P2.1
  Bottom Layer w0.152: v1(-34.092,43.535) -32.822,42.265 -32.822,41.495 v1(-32.763,41.436)
SD2: P2.2 U1.17 | length 13.6
  Top Layer w0.152: U1.17 -36.286,44.205 v1(-35.489,43.408)
  Top Layer w0.254: v1(-30.917,41.249) -29.774,40.106 -29.774,37.078 P2.2
  Bottom Layer w0.152: v1(-35.489,43.408) -32.441,40.36 -31.261,40.36 -30.917,40.703 v1(-30.917,41.249)
SD3: P2.3 U1.16 | length 14.6
  Top Layer w0.152: U1.16 -36.686,43.716 -35.616,42.646 -30.79,42.646 -28.667,40.523 P2.3
SD5: P2.5 U1.4 | length 21.4
  Top Layer w0.152: U1.4 -37.086,51.463 v1@-37.013,51.536 ; v1(-28.885,43.154) -26.467,40.736 P2.5
  Bottom Layer w0.152: v1(-37.14,51.409) v1(-28.885,43.154)
SD7: P2.7 U1.5 | length 38.2
  Top Layer w0.152: v1(-39.299,51.282) -37.5,49.483 -37.5,48.962 U1.5 ; v1(-26.345,43.027) -24.267,40.949 P2.7
  Bottom Layer w0.152: v1@-31.298,43.916 v1(-31.552,43.916) -31.933,43.916 v1(-39.299,51.282) -38.156,52.425 -35.87,52.425 v1@-26.409,42.964
SD8: P2.8 U1.6 | length 31.4
  Top Layer w0.152: v1(-39.934,50.012) -39.807,49.885 -38.553,49.885 -37.886,49.218 U1.6 ; v1(-24.313,42.519) -23.167,41.373 P2.8
  Bottom Layer w0.152: v1(-39.934,50.012) -39.934,52.806 -39.807,52.933 -34.727,52.933 v1(-24.313,42.519)
SD_EN: P3.16 U11.3 | length 27.6
  Top Layer w0.254: P3.16 -56.19,28.549 -52.761,28.549 -45.207,20.995 U11.3
SD_SWITCH: P3.17 U1.1 U1.2 U1.3 | length 53.1
  Top Layer w0.152: P3.17 -56.19,31.343 -42.347,31.343 -37.267,36.423 -37.267,40.525 -37.357,40.614 -38.918,40.614 -42.22,43.916 v1(-42.22,44.678) ; v1(-42.474,49.631) -42.474,50.901 -41.077,52.298 -36.505,52.298 -36.378,52.171 -36.378,51.028 ; U1.3 -36.686,50.72 -36.378,51.028 ; U1.2 -36.286,50.936 ; U1.1 -35.886,50.536 -36.286,50.936 ; -36.378,51.028 -36.286,50.936
  Bottom Layer w0.152: v1(-42.474,49.631) -42.474,45.056 -42.22,44.802 v1(-42.22,44.678)
SDA: P3.18 P8.4 U3.27 U7.13 U8.11 | length 155.1
  Top Layer w0.152: P8.4@-94.996,22.58 -86.797,22.58 v1@-84.257,20.04 ; v1(-76.002,18.262) -71.303,18.262 v1(-70.414,19.151) ; v1@-59.873,31.978 -58.095,33.756 P3.18 -56.196,33.635 -46.533,33.635 -46.411,33.756 ; U8.11 -49.247,39.128 -49.006,39.369 -46.526,39.369 -46.284,39.128 -46.284,33.883 -46.411,33.756 ; U7.13 -41.026,39.09 -39.462,39.09 -38.664,38.292 -38.664,35.457 -40.365,33.756 -46.411,33.756 ; v1(-18.389,20.518) -18.008,20.137 -17.119,20.137 -16.579,19.597 U3.27
  Bottom Layer w0.152: v1(-84.384,20.04) -84.384,14.833 -82.162,12.61 -82.035,12.61 -79.939,14.706 -79.304,14.706 -75.875,18.135 v1@-75.875,18.262 ; v1(-70.414,19.151) -70.287,19.278 -70.287,22.072 -70.16,22.199 -70.16,22.237 -70.071,22.326 -70.033,22.326 -69.525,22.834 -68.89,22.834 v1(-59.873,31.851) ; P3.18 -18.733,33.756 -18.733,28.362 -14.554,24.183 -14.554,19.013 -15.025,18.542 -17.78,18.542 -18.669,19.431 -18.669,19.772 -18.457,19.984 -18.457,20.449 v1(-18.389,20.518)
TX: P3.1 P5.6 P7.4 P19.6 | length 95.6
  Top Layer w0.152: P5.6 -91.584,44.589 -92.67,45.675 -92.67,48.33 -90.861,50.139 -78.288,50.139 -77.145,48.996 P3.1 -71.43,48.996 -70.033,47.599 -70.033,43.281 -70.668,42.646 -73.462,42.646 -76.891,39.217 P7.4
  Bottom Layer w0.152: P19.6 -122.555,26.543 -91.343,26.543 P7.4
TXD2: P3.21 P10.2 | length 74.3
  Top Layer w0.254: P10.2@-112.578,14.833 -102.672,14.833 -99.624,17.881 v1(-81.717,17.881)
  Bottom Layer w0.254: v1@-81.811,17.926 -76.129,23.608 -76.129,28.422 -73.234,31.318 -73.234,32.752 -72.777,33.209 -72.777,36.982 -72.192,37.566 -69.779,37.566 -64.699,42.646 -58.095,42.646 -57.968,42.519 -57.46,42.519 P3.21
V_BATT: P4.1 P6.1 P9.2 P11.1 P12.1 R1.2 | length 102.4
  Top Layer w0.254: R1.2 -56.102,3.149 v1(-54.158,3.149) -39.142,3.149 -36.475,5.816 -31.298,5.816
  Top Layer w0.508: P9.2 -32.695,10.515 -31.298,9.118 -31.298,5.816 -28.276,2.794 -0.635,2.794 6.746,10.175 ; P6.1 17.335,16.573 12.002,16.573 P12.1 8.255,16.637 6.746,15.128 6.746,10.175 ; P4.1 17.462,9.207 12.002,9.207 P11.1 7.65,9.271 6.746,10.175
V_BCKP: P10.4 R1.1 R2.2 | length 59.3
  Top Layer w0.152: R2.2 -58.921,3.022 R1.1
  Top Layer w0.254: -58.921,3.022 v1(-58.921,4.565)
  Bottom Layer w0.254: P10.4@-112.578,9.753 -103.18,9.753 -100.132,6.705 -79.118,6.705 -78.61,6.197 -60.553,6.197 v1(-58.921,4.565)
VA: C3.1 C6.1 U2.5 U3.5 | length 7.5
  Top Layer w0.152: U3.5 -11.575,14.197 C6.1 -11.546,13.421 -10.655,12.53 U2.5 C3.1
VCC5: C34.1 C35.1 P1.2 P1.4 P5.1 P5.2 P7.6 P16.1 U12.13 U12.14 U12.15 | length 158.1
  Top Layer w0.152: -94.29,40.233 -94.036,40.487 -84.638,40.487 -84.081,41.044 -84.081,43.789 P5.1 ; -94.29,43.789 P5.2
  Top Layer w0.254: -94.361,34.163 -94.29,34.163 -78.695,34.163 P7.6 ; C34.1 C34.1@-70.658,7.452 ; C35.1 C35.1@-66.436,7.493 ; U12.15 U12.14 U12.13
  Top Layer w0.305: P16.1 -76.002,9.118 -74.326,7.442 C34.1 ; C34.1@-70.658,7.452 C35.1 ; C35.1@-66.436,7.493 U12.15
  Top Layer w0.508: P16.1 -78.161,11.15 -78.796,11.785 -78.796,22.275 -81.261,24.739 -93.064,24.739 -94.29,25.966 -94.29,34.163 -94.29,40.233 -94.29,40.487 -94.29,43.789 -94.29,48.107 -91.242,51.155 -76.51,51.155 -74.732,52.933 -74.732,54.461 -71.662,57.531 -49.485,57.531 P1.2 P1.4
VCC_GPS: C29.1 P10.5 U10.5 | length 27.5
  Top Layer w0.152: C29.1 -89.51,7.533 U10.5
  Top Layer w0.254: P10.5@-112.578,7.213 -107.244,7.213 -105.466,5.435 -90.099,5.435 -89.576,5.958 C29.1
VCC_SD: C31.1 P2.4 U11.5 | length 16.3
  Top Layer w0.152: C31.1@-27.567,23.152 C31.1 C31.1@-27.442,22.895
  Top Layer w0.305: U11.5 C31.1@-27.442,22.895 ; C31.1@-27.567,23.152 P2.4
VCC_TILE: C25.2 C26.1 P20.1 P20.2 P20.3 U.1 U.2 | length 32.6
  Top Layer w0.254: C26.1 -93.78,57.365 C25.2 -92.429,57.338 -91.382,57.338 ; U.2 -91.233,56.388 -91.382,56.537 -91.382,57.338 ; U.1 -91.382,57.338
  Top Layer w0.508: P20.3 P20.2 P20.1 -93.853,61.849 -92.456,60.452 C25.2
VDDD: C2.1 C17.1 U3.30 U6.5 | length 9.3
  Top Layer w0.152: C2.1@-16.596,18.359 C2.1 ; C2.1@-16.357,18.37 -16.083,18.097 U3.30
  Top Layer w0.254: U6.5 -20.604,18.473 -20.604,16.906 C17.1 -20.533,16.835 -19.405,16.835 -19.151,17.089 -19.151,17.767 -18.792,18.126 -18.785,18.12 C2.1
VDDIO: C9.1 C13.1 U3.20 U5.5 | length 6.5
  Top Layer w0.152: C13.1 U5.5@-12.543,24.963 ; U3.20 -11.575,23.038 -11.301,23.312 C9.1@-11.292,23.312
  Top Layer w0.254: U5.5@-12.543,24.963 -12.674,24.832 -12.674,23.968 -12.525,23.82 -12.145,23.82 -11.996,23.671 -11.996,23.281 -11.773,23.058 C9.1
VH: C7.1 P13.1 P15.1 U4.5 | length 49.9
  Top Layer w0.152: U4.5 C7.1@-1.456,6.99
  Top Layer w0.254: C7.1@-1.456,6.99 -1.498,7.032 -1.498,12.218 5.842,19.558 15.621,19.558 16.256,20.193 16.256,26.289 ; P13.1 15.875,36.703 16.256,36.322 16.256,26.289 ; P15.1 15.748,26.797 16.256,26.289
VIN: C4.1 C8.1 C12.1 C16.1 C23.2 C24.1 C28.1 C30.1 C36.2 C38.2 C39.1 L1.2 P3.Vin P9.3 R3.2 U2.1 U4.1 U5.1 U6.1 U10.1 U11.1 U12.6 U.6 | length 296.5
  Top Layer w0.152: U10.1 -83.322,7.533 C28.1 -83.241,7.452 -83.241,6.667 -83.152,6.578 -79.939,6.578 -79.431,7.086 v2(-79.431,8.356) v2@-79.558,8.483 ; C4.1 C4.1@-14.818,11.247
  Top Layer w0.2: C4.1@-14.818,11.247 U2.1
  Top Layer w0.254: U.6 -87.392,57.411 -86.734,57.411 -86.614,57.531 -86.202,57.531 -85.979,57.754 C24.1 -85.925,57.824 C23.2 -83.273,57.824 -82.169,58.928 v1(-82.169,60.706) ; R3.2 -53.65,17.373 -51.618,15.341 ; C36.2@-53.443,10.093 C36.2 C36.2@-53.211,9.977 ; C30.1 C30.1@-34.044,22.928 ; P9.3 -32.568,13.055 -32.06,12.547 -30.371,12.547 C38.2 -28.781,12.458 C39.1 ; U11.1@-31.896,22.928 U11.1 ; U6.1 -20.66,22.196 -20.421,22.435 C16.1 -19.547,22.535 -18.516,23.566 -18.516,27.503 ; -18.796,12.435 -19.05,12.181 -19.05,10.287 -16.962,8.199 -8.483,8.199 -8.058,7.774 -8.058,7.023 -6.037,7.023 U4.1@-6.004,6.99 ; -16.924,12.435 -16.005,11.516 C4.1 ; C12.1 -8.244,24.279 -8.095,24.13 -6.092,24.13 -5.943,24.279 -5.943,29.154
  Top Layer w0.305: U12.6 C36.2@-53.443,10.093 ; C30.1@-34.044,22.928 -32.97,22.928 ; v1(-33.271,24.679) -33.271,24.597 -33.076,24.403 -33.076,23.034 -32.97,22.928 ; U11.1@-31.896,22.928 -32.97,22.928 ; U5.1 -10.047,25.059 -8.275,25.059 C12.1
  Top Layer w0.356: C36.2@-53.211,9.977 -52.537,9.977 -51.618,10.896 -51.618,15.341 -50.602,16.357 L1.2@-46.436,16.357
  Top Layer w0.508: L1.2@-46.436,16.357 -43.236,16.357 -38.791,16.357 -35.489,13.055 P9.3 ; C39.1 -24.765,12.435 ; -16.924,12.435 -18.796,12.435 -24.765,12.435 ; -5.943,29.154 -16.865,29.154 -18.516,27.503 -20.884,27.503 -24.765,23.622 -24.765,12.435
  Bottom Layer w0.254: P9.3 -33.965,13.182 -33.965,24.088 -33.718,24.336 -33.71,24.336 -33.367,24.679 v1(-33.271,24.679)
  Bottom Layer w0.508: v1(-82.169,60.706) -77.393,60.706 -77.012,61.087 -72.263,61.087 -71.389,60.213 -71.389,56.134 ; P3.Vin -68.046,54.076 -70.104,56.134 -71.389,56.134 ; P9.3 -40.163,6.73 -77.806,6.73 -79.368,8.293 -79.495,8.293 -86.416,15.214 -86.416,22.677 -79.883,29.21 -78.105,29.21 -73.716,33.599 -73.716,55.092 -72.674,56.134 -71.389,56.134
VSENS: P3.A14 R3.1 R4.2 | length 5.8
  Top Layer w0.254: R4.2 R3.1 -60.215,18.555 -58.857,19.913 P3.A14
pads on no net: P1.1 P1.3 P1.5 P1.7 P1.8 P1.10 P1.11 P1.12 P1.17 P1.19 P1.21 P1.23 P1.27 P1.28 P1.29 P1.31 P1.32 P1.33 P1.35 P1.36 P1.38 P1.40 P2.0 P3.3.3V2 P3.AGND P3.AREF P3.GND2 P3.VBat P5.0 P5.9 P5.10 P5.11 P5.13 P5.14 P5.16 P5.17 P5.20 P9.1 P19.2 P19.4 P19.5 U1.7 U1.12 U1.25 U3.2 U3.4 U3.6 U3.8 U3.9 U3.11 U3.12 U3.16 U3.17 U3.18 U3.19 U3.22 U3.28 U6.4 U7.3 U7.8 U7.9 U7.10 U7.11 U8.7 U8.8 U12.10 U12.12 U12.16 U.4 U.7
copper on no net: | length 2.5
  Top Layer w0.254: -7.041,31.47 -7.041,34.01

## Polygon pours and split planes (outlines as drawn)
DGND on GND (split plane): 23.874,41.785 6.731,41.785 6.681,41.776 6.639,41.748 1.757,36.865 1.729,36.823 1.719,36.774 1.719,32.87 -14.788,32.87 -14.838,32.86 -14.88,32.832 -24.278,23.434 -24.306,23.392 -24.316,23.342 -24.316,-5.078 -159.51,-5.078 -159.51,29.843 -96.012,29.843 -95.962,29.852 -95.92,29.88 -95.892,29.922 -95.883,29.972 -95.883,60.325 -95.892,60.375 -95.92,60.417 -95.962,60.445 -96.012,60.454 -96.062,60.445 -96.104,60.417 -96.447,60.073 -159.51,60.073 -159.51,64.133 23.874,64.133
AGND on GND (split plane): 23.874,-5.078 -24.057,-5.078 -24.057,23.288 -14.735,32.611 1.849,32.611 1.898,32.62 1.94,32.648 1.968,32.69 1.978,32.74 1.978,36.72 6.785,41.527 23.874,41.527
no net on GND (split plane): -96.141,30.101 -159.51,30.101 -159.51,59.815 -96.393,59.815 -96.343,59.824 -96.301,59.852 -96.141,60.012
3V3 on VCC (split plane): 23.874,41.785 6.731,41.785 6.681,41.776 6.639,41.748 1.757,36.865 1.729,36.823 1.719,36.774 1.719,32.87 -14.788,32.87 -14.838,32.86 -14.88,32.832 -24.278,23.434 -24.306,23.392 -24.316,23.342 -24.316,-5.078 -118.362,-5.078 -118.362,24.203 -117.802,24.763 -95.504,24.763 -95.454,24.772 -95.412,24.8 -95.158,25.054 -95.13,25.096 -95.121,25.146 -95.121,64.133 23.874,64.133
VA on VCC (split plane): 23.874,-5.078 -24.057,-5.078 -24.057,23.288 -14.735,32.611 1.849,32.611 1.898,32.62 1.94,32.648 1.968,32.69 1.978,32.74 1.978,36.72 6.785,41.527 23.874,41.527
no net on VCC (split plane): -95.379,25.2 -95.558,25.021 -117.856,25.021 -117.906,25.012 -117.948,24.984 -118.583,24.349 -118.611,24.307 -118.62,24.257 -118.62,-5.078 -159.51,-5.078 -159.51,64.133 -95.379,64.133

## Other copper
GND (plane layer: these items are gaps in the copper):
  lines w0.254: -160.02,29.972 -96.012,29.972 -96.012,60.325 -96.393,59.944 -160.02,59.944 ; -24.186,-5.588 -24.186,23.342 -14.788,32.74 1.849,32.74 1.849,36.774 6.731,41.656 24.511,41.656
VCC (plane layer: these items are gaps in the copper):
  lines w0.254: -118.491,-5.588 -118.491,24.257 -117.856,24.892 -95.504,24.892 -95.25,25.146 -95.25,64.643 ; -24.186,-5.461 -24.186,23.342 -14.788,32.74 1.849,32.74 1.849,36.774 6.731,41.656 24.384,41.656

## Silkscreen, mask and mechanical layers (free items; w line width, h text height)
Top Overlay:
  lines w0.254: -159.131,25.019 -96.393,25.019 -96.266,25.146 -96.266,63.246 -96.393,63.373 -159.004,63.373 -159.131,63.246 -159.131,25.019
  text "G" at -126.746,61.705 h1.52 r180
  text "3V3" at -105.664,61.705 h1.52 r180
  text "Medusa - AI" at -26.67,47.677 h5.08
  text "Swarm Tile" at -143.891,43.617 h5
  text "LEFT" at 10.16,32.131 h1.52 r90
  text "G" at -131.826,25.163 h1.52
  text "1" at -136.652,25.146 h1.52
  text "RIGHT" at 10.143,22.606 h1.52 r90
  text "ON" at -32.868,15.722 h4.06 r90
  text "+" at -33.401,-0.031 h1.52
  text "+" at -26.289,-0.031 h1.52
  text "BAT" at -36.251,-0.153 h1.52
  text "BAT" at -29.139,-0.153 h1.52
Mechanical 1:
  the board outline again, w0.254

## Text inside footprints (layer, text, board x,y; h text height)
C38: Top Overlay "+" at -30.663,13.055 h0.5 r90
P1: Top Overlay "39" at -2.215,51.663 h1.27; Top Overlay "40" at -2.342,59.029 h1.27; Top Overlay "2" at -51.999,56.997 h1.27; Top Overlay "1" at -51.745,54.203 h1.27